# Altium PCB CanhBaoMucNuoc.PcbDoc
Units mm, origin at the board's own origin, x right, y up, seen from the top; angles counter-clockwise.
Board outline 59.94 x 71.88 mm, 2 copper layers (Top Layer, Bottom Layer); 21 components, 18 nets, 53 pads, 0 vias.
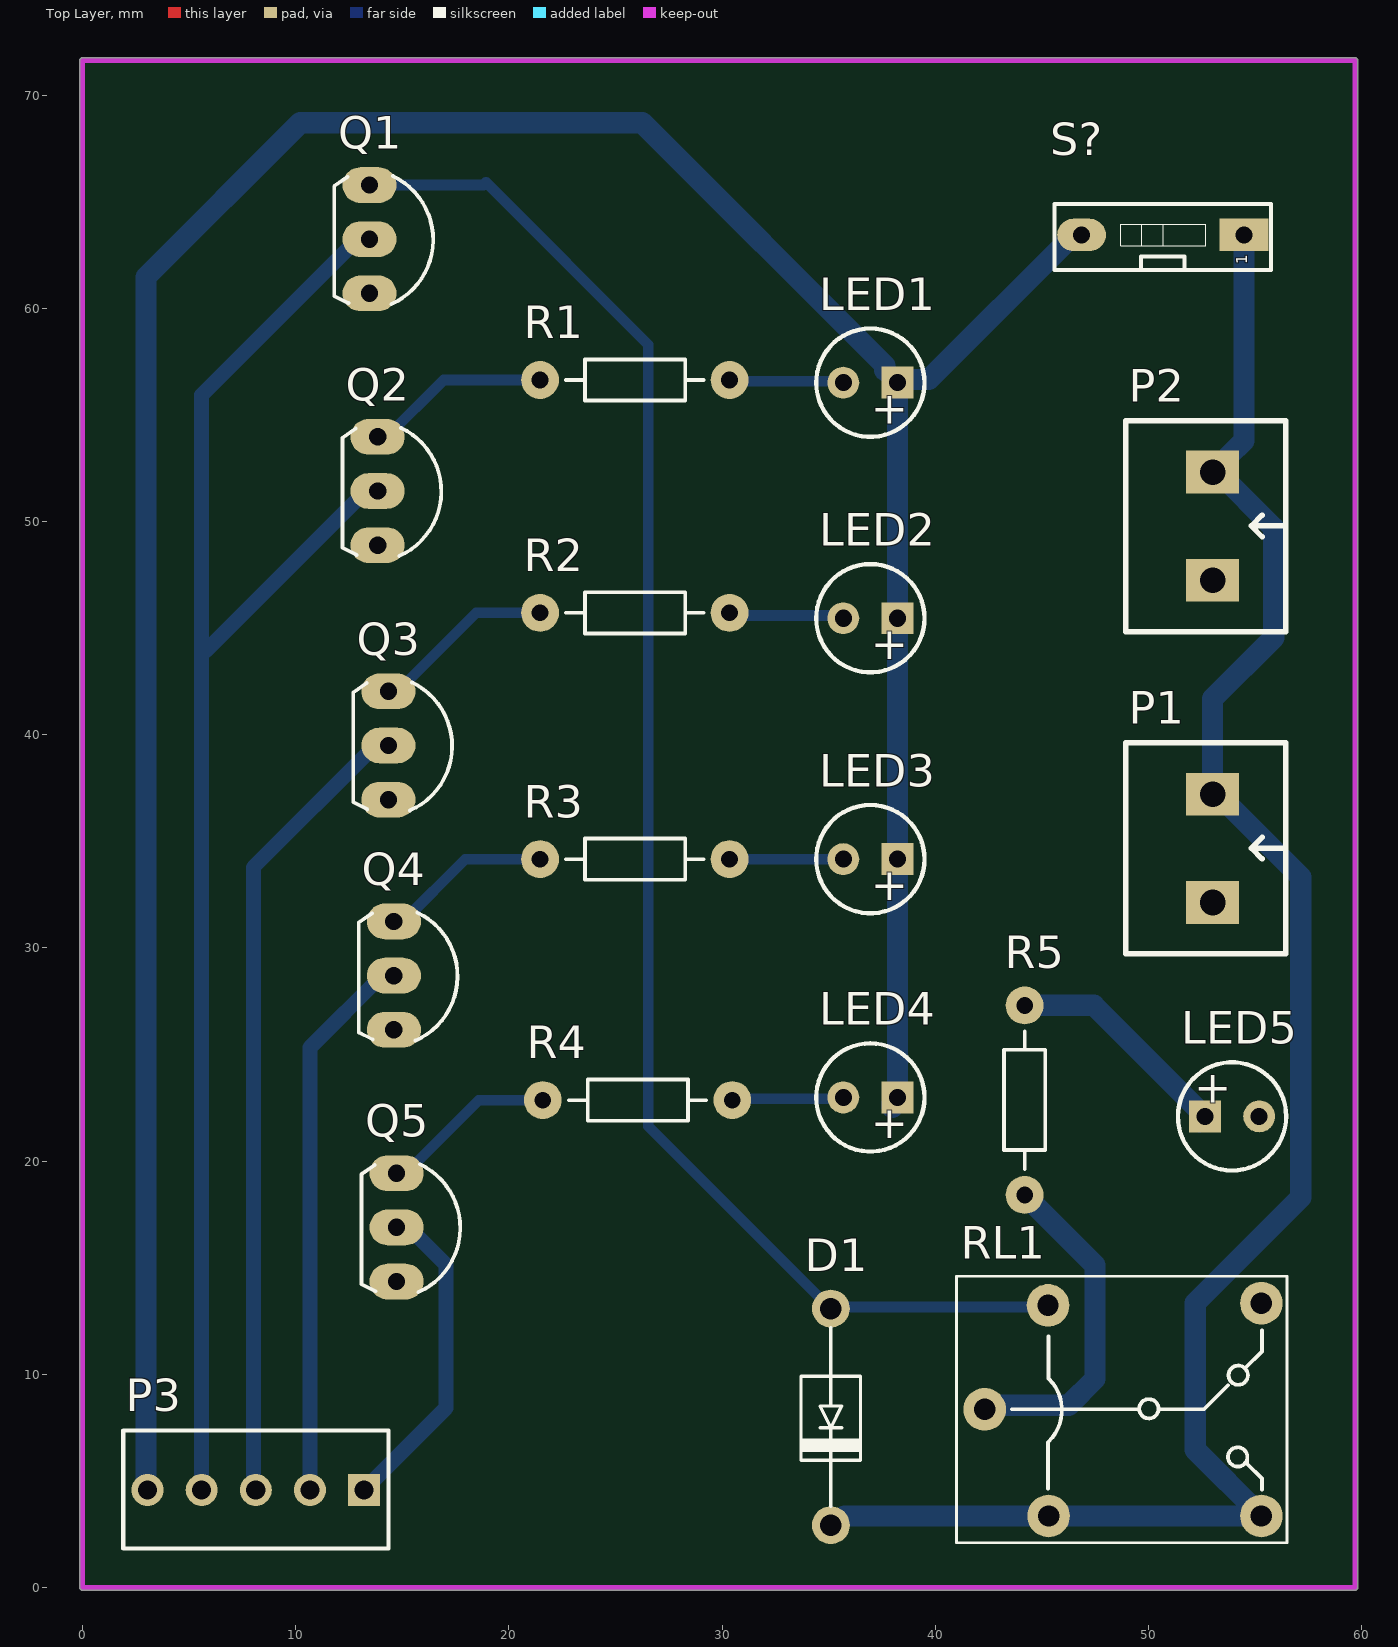
[diagram p0: Top Layer view]
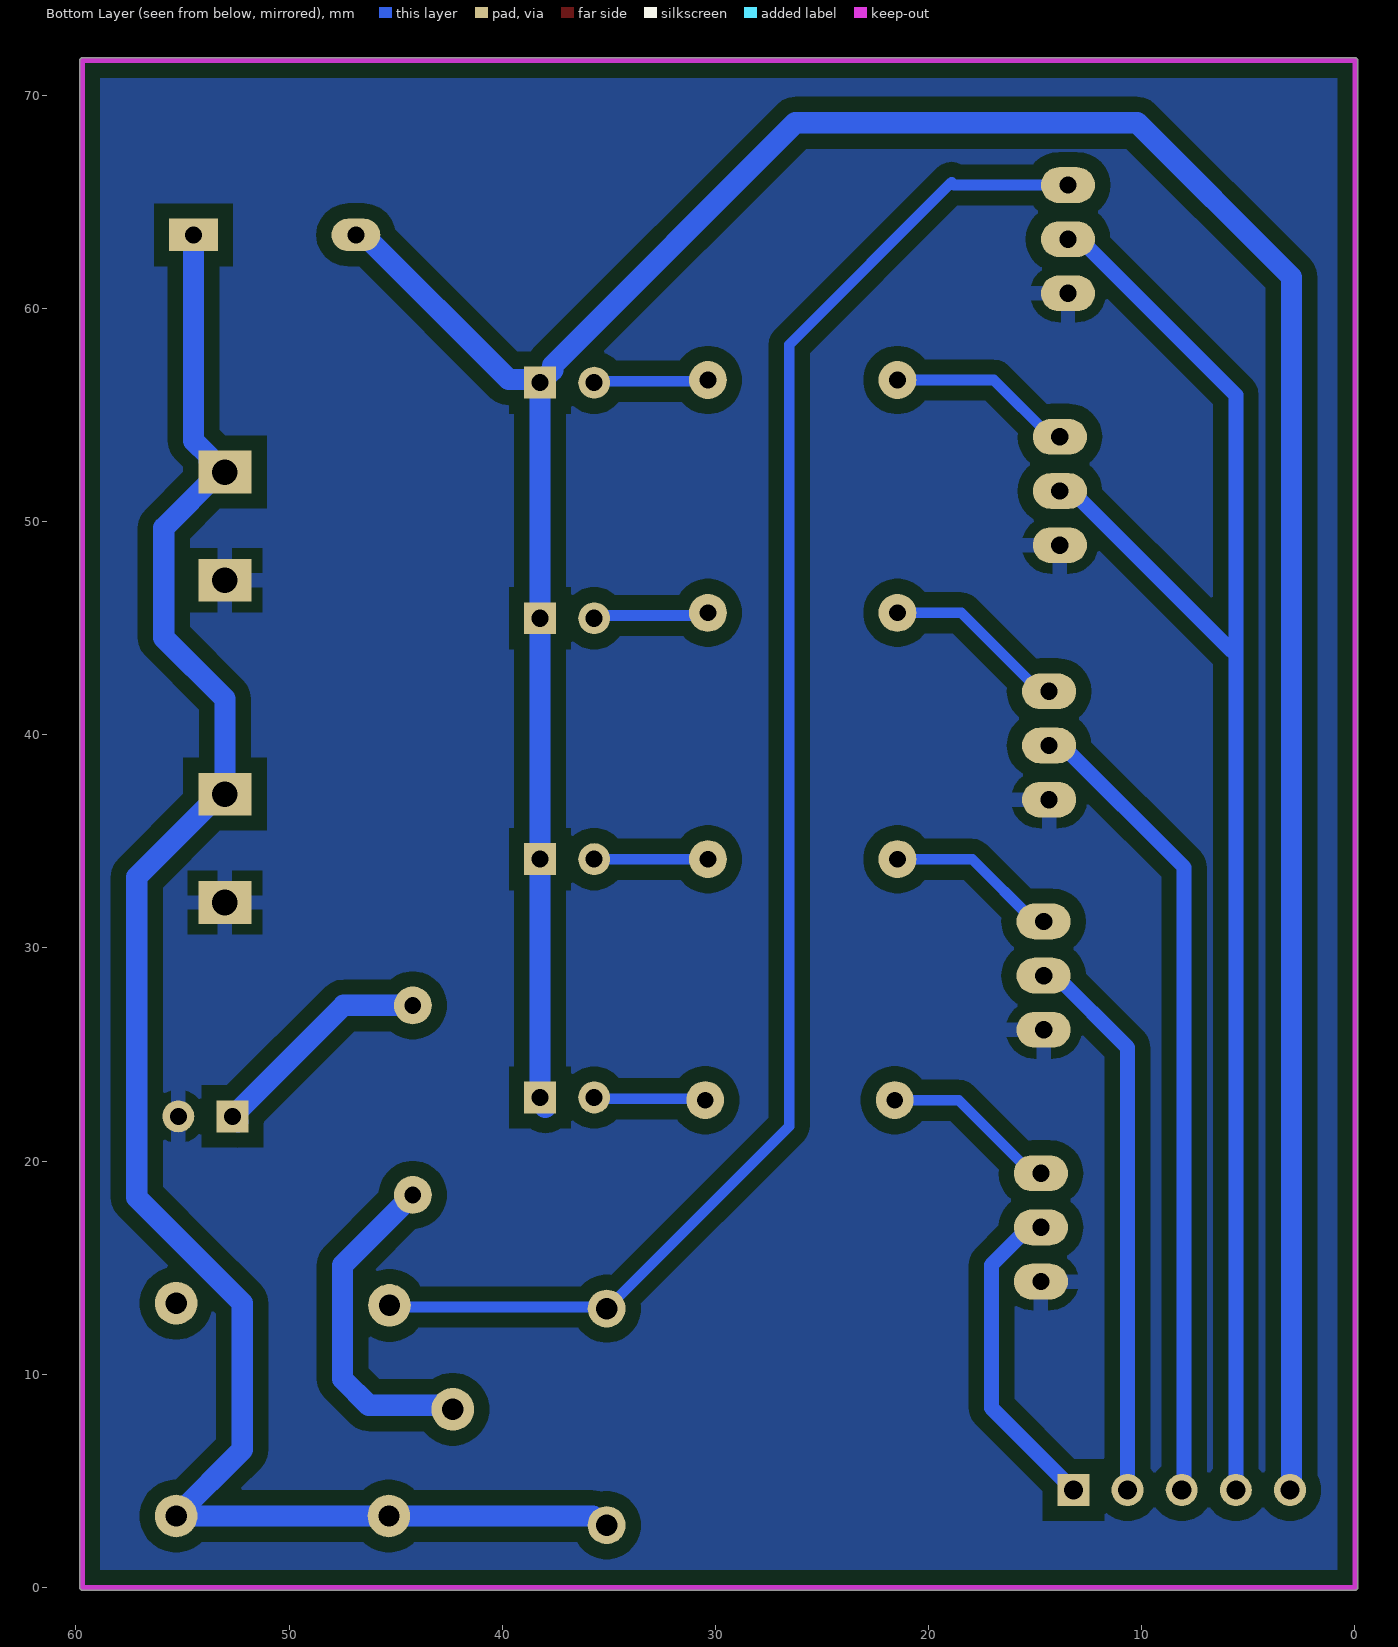
[diagram p1: Bottom Layer view, seen from below]
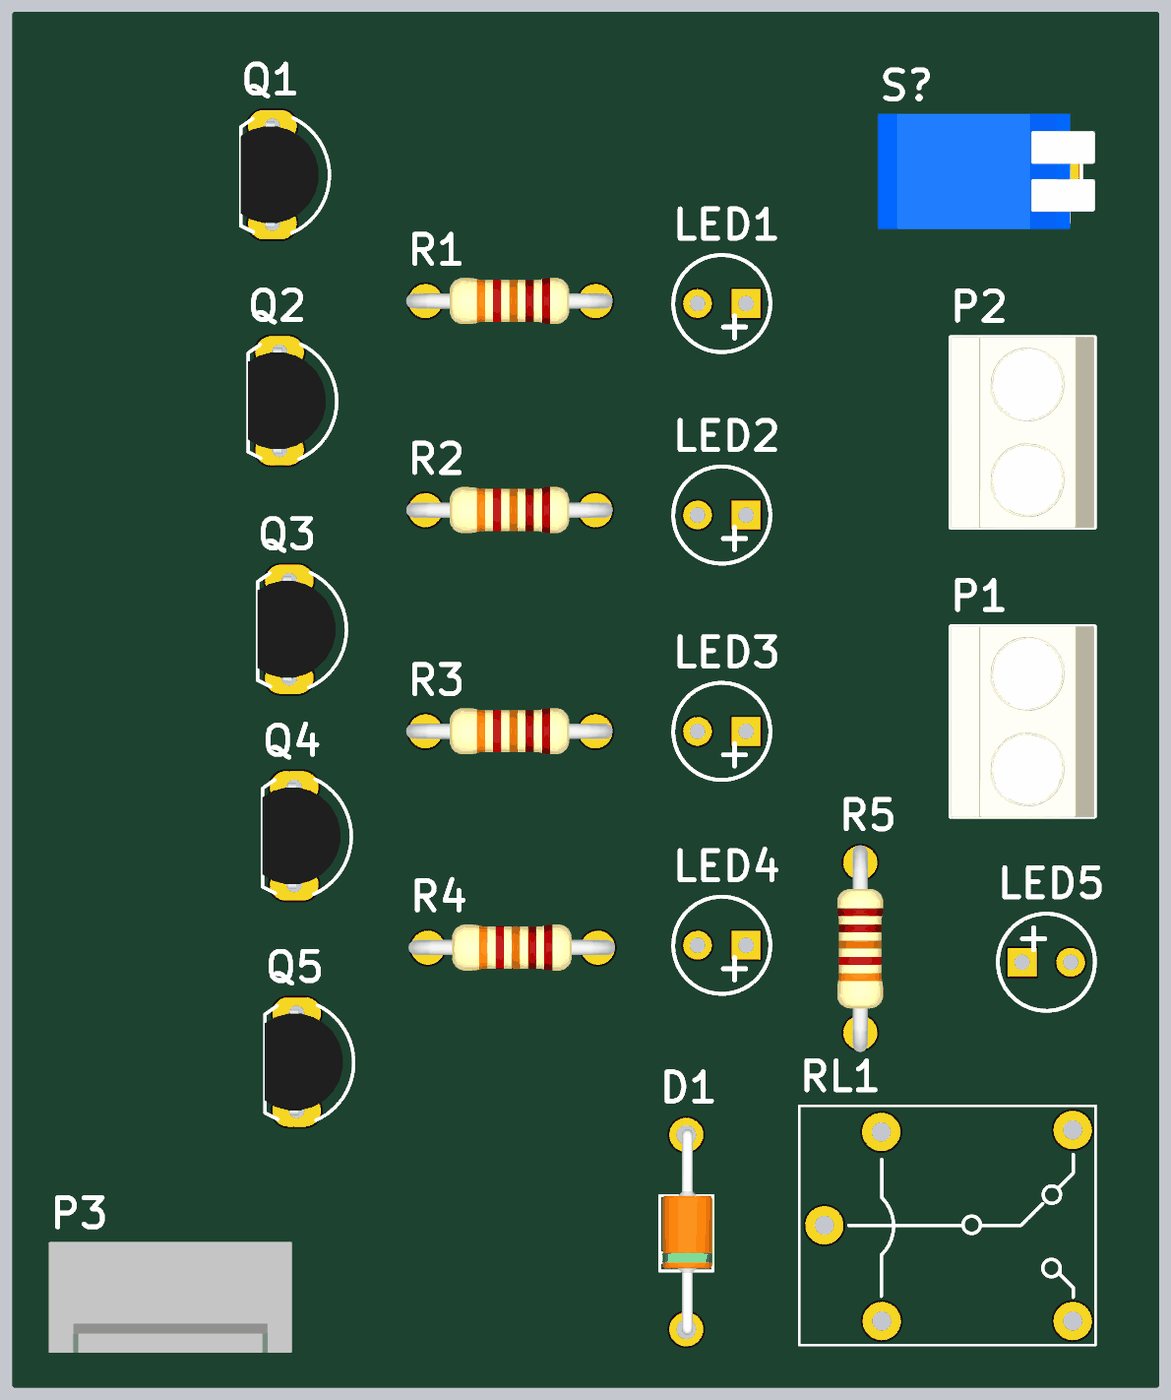
[diagram p2: 3D render of the assembled board from above, using the file's embedded part models]

## Layer stack, top to bottom
Top Solder: solder mask 0.0102, Solder Resist, Dk 3.5
Top Layer: signal copper 0.0356
Dielectric 1: dielectric 0.32, FR-4, Dk 4.8
Bottom Layer: signal copper 0.0356
Bottom Solder: solder mask 0.0102, Solder Resist, Dk 3.5

## Board outline
-0.127,0 -0.127,71.628 cw(c0,71.628) 0,71.755 59.69,71.755 cw(c59.69,71.628) 59.817,71.628 59.817,0 cw(c59.69,0) 59.69,-0.127 0,-0.127 cw(c0,0)

## Design rules (kind name [scope] priority, off if disabled: settings)
Clearance [All] p1: gap=0.7 ignorepadtopadclearanceinfootprint=FALSE
PolygonConnect [All] p1: connectstyle=Relief reliefconductorwidth=0.7 reliefentries=4 polygonreliefangle="90 Angle" airgapwidth=0.5
RoutingLayers [All] p1: top layer_v5=FALSE bottom layer_v5=TRUE
RoutingVias [All] p1: holewidth=0.711 width=1.27 viastyle="Through Hole" minholewidth=0.711 minwidth=1.27 maxholewidth=0.711 maxwidth=1.27
SolderMaskExpansion [All] p1: expansion=0.102 istentingtop=FALSE
Width [All] p1: maxlimit=1 minlimit=0.5 preferedwidth=0.7
29 further rules are at their usual default settings.

## Components (designator, comment, footprint, x,y, rotation, side; value= is the part's Value field where it differs from the comment)
D1 "Diode" DIO-1A 35.103,13.081 r270 top value=1N5007
LED1 "LED5" LED5MM 38.227,56.515 r180 top
LED2 "LED5" LED5MM 38.227,45.466 r180 top
LED3 "LED5" LED5MM 38.227,34.163 r180 top
LED4 "LED5" LED5MM 38.227,22.987 r180 top
LED5 "LED5" LED5MM 52.654,22.098 r0 top
P1 "Header 2 - M" "Medium - Header 2" 53.01,34.671 r270 top
P2 "Header 2 - M" "Medium - Header 2" 53.01,49.784 r270 top
P3 "Header 5L" "HDR1X5 - L" 13.208,4.572 r180 top
Q1 "C9014" QTO-92 13.462,63.246 r270 top
Q2 "C9014" QTO-92 13.843,51.435 r270 top
Q3 "C9014" QTO-92 14.351,39.497 r270 top
Q4 "C9014" QTO-92 14.605,28.702 r270 top
Q5 "C9014" QTO-92 14.732,16.891 r270 top
R1 "220" R1/4W 21.463,56.642 r0 top
R2 "220" R1/4W 21.463,45.72 r0 top
R3 "220" R1/4W 21.463,34.163 r0 top
R4 "220" R1/4W 21.59,22.86 r0 top
R5 "1K" R1/4W 44.196,18.415 r90 top
RL1 "Relay 10A/12V" RL_T78 42.295,8.357 r0 top value="Relay SPDT, 10A, 12V"
S? "" SW-DIP2 51.562,64.516 r90 top

## Footprints (in the part's own frame and the unit in brackets; to place one, negate y for a bottom-side part, rotate by r counter-clockwise, add the part's x,y. Pads: shape width x height; smd on the part's side, far side on the other; paste and mask are expansions set on the pad)
DIO-1A [mil]
  round 70 hole 40: 1(0,0) 2(400,0)
  silkscreen extent 35,-55 365,55, body extent -11,-50 411,54, height 102
"HDR1X5 - L" [mm] "Connector; Header; 5 Position"
  rect 1.5x1.5 hole 0.9: 1(0,0)
  round 1.5 hole 0.9: 2(2.54,0) 3(5.08,0) 4(7.62,0) 5(10.16,0)
  silkscreen extent -1.14,-2.79 11.3,2.74, body extent -1.27,-2.92 11.43,2.88, height 11.72
LED5MM [mm]
  rect 1.5x1.5 hole 0.8: 1(0,0)
  round 1.5 hole 0.8: 2(2.54,0)
  silkscreen extent -1.27,-2.54 3.81,2.54
"Medium - Header 2" [mm]
  rect 2x2.5 hole 1.2: 1(-2.54,0) 2(2.54,0)
  silkscreen extent -4.95,-4.08 4.95,3.43, body extent -5,-4.07 5,3.43, height 10
QTO-92 [mil] "TO-92"
  oval 66x100 hole 32: 1(-100,0) 2(0,0) 3(100,0)
  silkscreen extent -117,-65 120,118, body extent -109,-66 109,95, height 245
R1/4W [mil] "R 1/4W, 2 Pin, 350mil"
  round 70 hole 31: 1(0,0) 2(350,0)
  silkscreen extent 48,-38 302,38, body extent -40,-47 386,47, height 111
RL_T78 [mm]
  round 2 hole 1: 1(0.025,0) 2(13.005,4.978) 3(13.005,-5.004) 4(3.023,-5.004) 5(2.997,4.877)
  silkscreen extent -1.29,-6.26 14.21,6.24, body extent -1.3,-6.25 14.2,6.22, height 13.5
SW-DIP2 [mil]
  rect 60x90 hole 31: 1(-42,-115)
  oval 60x90 hole 31: 4(-42,185)
  silkscreen extent -107,-165 15,235, body extent -161,-193 75,253, height 354

## Part data
D1: "Default Diode", Code - JEDEC=DO-214-AB, Published=8-Jun-2000, Publisher="Altium Limited", Revision="July-2002: Re-released for DXP Platform."
LED1 LED2 LED3 LED4 LED5: library part "LED 5mm", "LED 5mm"
P1 P2: "Header, 2-Pin, Medium", LatestRevisionDate=17-Jul-2002, LatestRevisionNote="Re-released for DXP Platform.", Publisher="Altium Limited"
P3: "Header, 5-Pin", LatestRevisionDate=17-Jul-2002, LatestRevisionNote="Re-released for DXP Platform.", Publisher="Altium Limited"
Q1 Q2 Q3 Q4 Q5: library part NPN_EBC, "P 600mW, EBC"
R1 R2 R3 R4 R5: library part Res, "Res"
RL1: library part "Relay 1", "Relay SPDT,10A - 12VDC 5 Pin"
S?: library part SWDIP2, "WS-DITV 2.54 mm small compact THT flat actuator with top tape", Manufacturer="Wurth Elektronik", Part No.=418127160902, ComponentLink1 Description=Manufacturer, ComponentLink1URL=http://www.we-online.com, ComponentLink2 Description=Datasheet, ComponentLink2URL=http://katalog.we-online.de/em/datasheet/4181271609xx.pdf, Created by="Baojun Chen", Created Date=Dec.2015, Pole=02

## Nets (pads, with @x,y where several pads share a name; then routed paths per layer and width w, separated by ;. In a path a pad name is that pad's centre, name@x,y a point inside that pad or via, vN(x,y) a via of type N, cw(c..) or ccw(c..) an arc to the next point about the centre after c; other vN are vias at no path point)
GND: LED5.2 P1.2 P2.2 Q1.3 Q2.3 Q3.3 Q4.3 Q5.3
NetD1_1: D1.1 Q1.1 RL1.5 | length 75.3
  Bottom Layer w0.5: Q1.1 18.796,65.786 18.923,65.913 26.543,58.293 26.543,21.641 D1.1 35.179,13.157 45.216,13.157 RL1.5
NetLED1_1: LED1.1 LED2.1 LED3.1 LED4.1 P3.5 S?.4 | length 146
  Bottom Layer w1: P3.5 2.978,4.642 2.978,61.468 10.217,68.707 26.253,68.707 37.637,57.323 37.637,57.105 LED1.1 ; LED4.1@37.977,22.519 37.977,22.737 LED4.1 LED3.1 LED2.1 LED1.1 ; S?.4 46.482,63.449 39.698,56.665 38.377,56.665 LED1.1
NetLED1_2: LED1.2 R1.2 | length 5.4
  Bottom Layer w0.5: R1.2 30.416,56.578 35.623,56.578 LED1.2
NetLED2_2: LED2.2 R2.2 | length 5.4
  Bottom Layer w0.5: R2.2 30.48,45.593 35.56,45.593 LED2.2
NetLED3_2: LED3.2 R3.2 | length 5.3
  Bottom Layer w0.5: R3.2 LED3.2
NetLED4_2: LED4.2 R4.2 | length 5.3
  Bottom Layer w0.5: R4.2 30.543,22.924 35.623,22.924 LED4.2
NetLED5_1: LED5.1 R5.2 | length 11
  Bottom Layer w1: R5.2 47.447,27.305 LED5.1 LED5.1@52.4,21.844
NetP3_1: P3.1 Q5.2 | length 15.2
  Bottom Layer w0.7: P3.1 17.052,8.416 17.052,15.133 15.294,16.891 Q5.2
NetP3_2: P3.2 Q4.2 | length 26.1
  Bottom Layer w0.7: P3.2@10.668,4.578 10.668,25.327 14.043,28.702 Q4.2
NetP3_3: P3.3 Q3.2 | length 38
  Bottom Layer w0.7: P3.3 8.015,4.685 8.015,33.782 13.73,39.497 Q3.2
NetP3_4: P3.4 Q1.2 Q2.2 | length 73.6
  Bottom Layer w0.7: P3.4 5.588,43.942 ; Q1.2 12.9,63.246 5.588,55.934 5.588,43.942 ; Q2.2 13.281,51.435 5.788,43.942 5.588,43.942
NetQ2_1: Q2.1 R1.1 | length 8.7
  Bottom Layer w0.5: Q2.1 14.275,53.975 16.942,56.642 R1.1
NetQ3_1: Q3.1 R2.1 | length 8.6
  Bottom Layer w0.5: Q3.1 14.783,42.037 18.466,45.72 R2.1
NetQ4_1: Q4.1 R3.1 | length 8.1
  Bottom Layer w0.5: Q4.1 15.037,31.242 17.958,34.163 R3.1
NetQ5_1: Q5.1 R4.1 | length 8.3
  Bottom Layer w0.5: Q5.1 15.164,19.431 18.593,22.86 R4.1
NetR5_1: R5.1 RL1.1 | length 15.8
  Bottom Layer w1: RL1.1 42.512,8.548 46.267,8.548 47.498,9.779 47.498,15.113 R5.1
VCC: D1.2 P1.1 P2.1 RL1.3 RL1.4 S?.1 | length 88.7
  Bottom Layer w1: D1.2 35.313,2.921 35.745,3.353 RL1.4 RL1.3 52.197,6.456 52.197,13.343 54.389,15.535 57.144,18.291 57.144,33.327 53.26,37.211 P1.1 53.01,41.685 55.88,44.555 55.88,49.704 P2.1@53.26,52.324 ; P2.1 P2.1@53.26,52.324 ; S?.1 54.483,53.797 53.76,53.074 53.76,52.824 P2.1@53.26,52.324
pads on no net: RL1.2

## Polygon pours and split planes (outlines as drawn)
GND on Drill Guide "GND_L02_P-001" (solid): 1.651,0 59.182,0 59.182,69.596 58.801,69.215 1.651,69.215
GND on Bottom Layer "GND_L02_P009" (solid, pour order 9): 0,0 59.69,0 59.69,71.628 0,71.628

## Keep-outs
Keep-Out Layer:
  lines w0.254: 0,0 59.69,0 59.69,71.628 0,71.628 0,0

## Text inside footprints (layer, text, board x,y; h text height)
LED1: Top Overlay "+" at 38.735,55.88 h1.52 r180
LED2: Top Overlay "+" at 38.735,44.831 h1.52 r180
LED3: Top Overlay "+" at 38.735,33.528 h1.52 r180
LED4: Top Overlay "+" at 38.735,22.352 h1.52 r180
LED5: Top Overlay "+" at 52.146,22.733 h1.52
S?: Top Overlay "1" at 54.635,62.078 h0.51 r90